# Altium PCB PCB2.PcbDoc
Units mm, origin at the board's own origin, x right, y up, seen from the top; angles counter-clockwise.
Board outline 31.39 x 23.51 mm, 2 copper layers (Top Layer, Bottom Layer); 24 components, 18 nets, 48 pads, 0 vias.
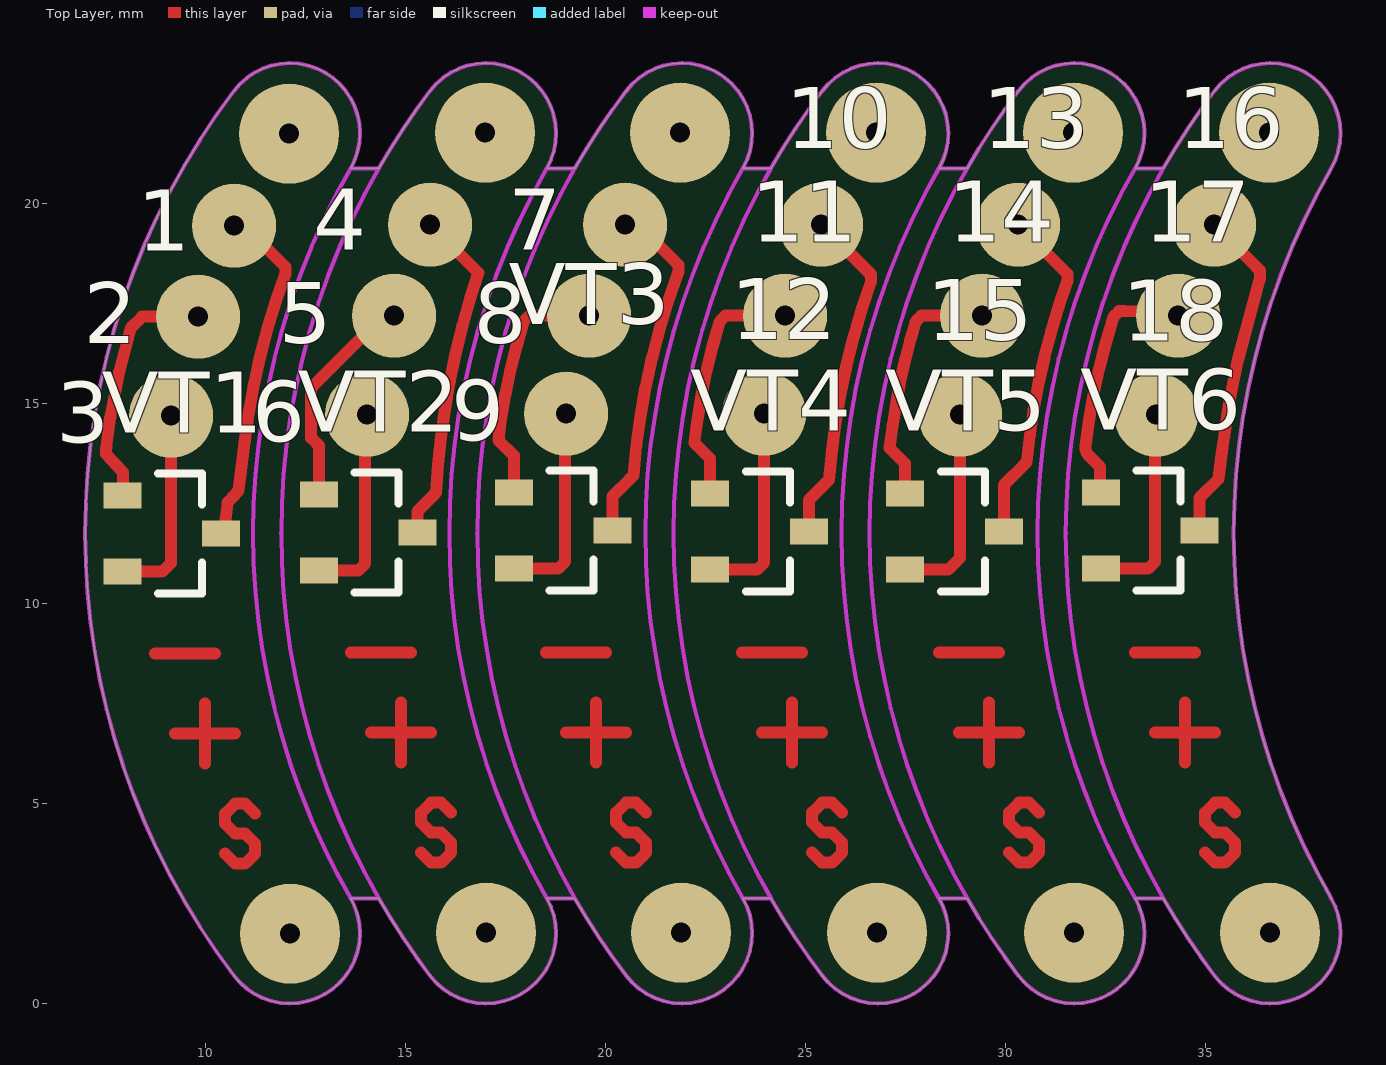
[diagram p0: Top Layer view]
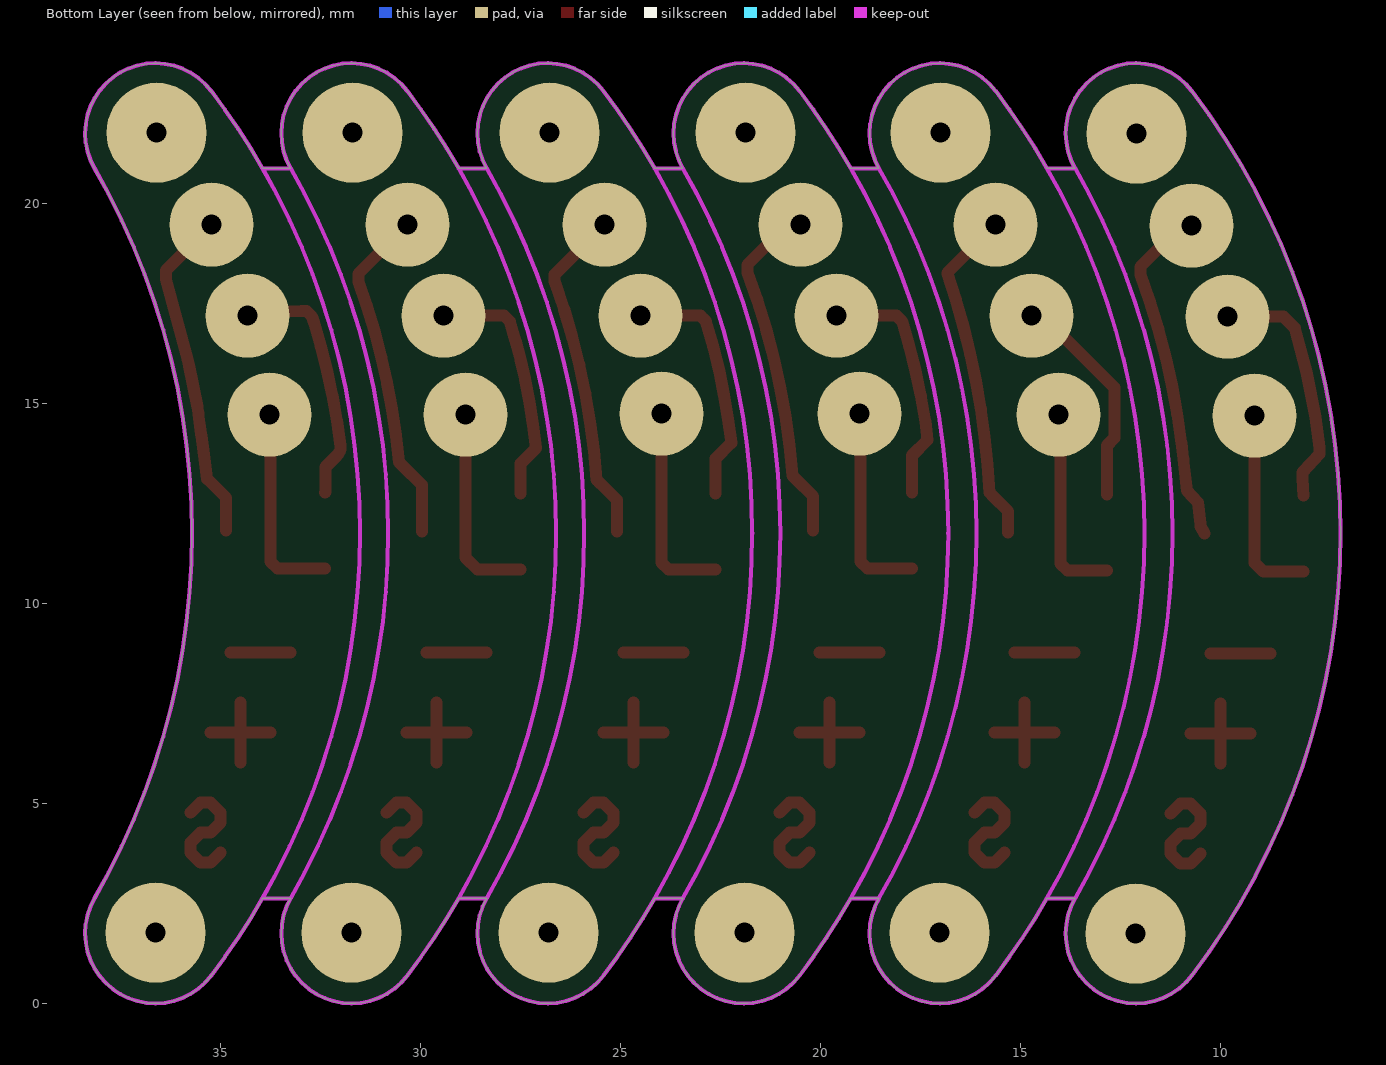
[diagram p1: Bottom Layer view, seen from below]
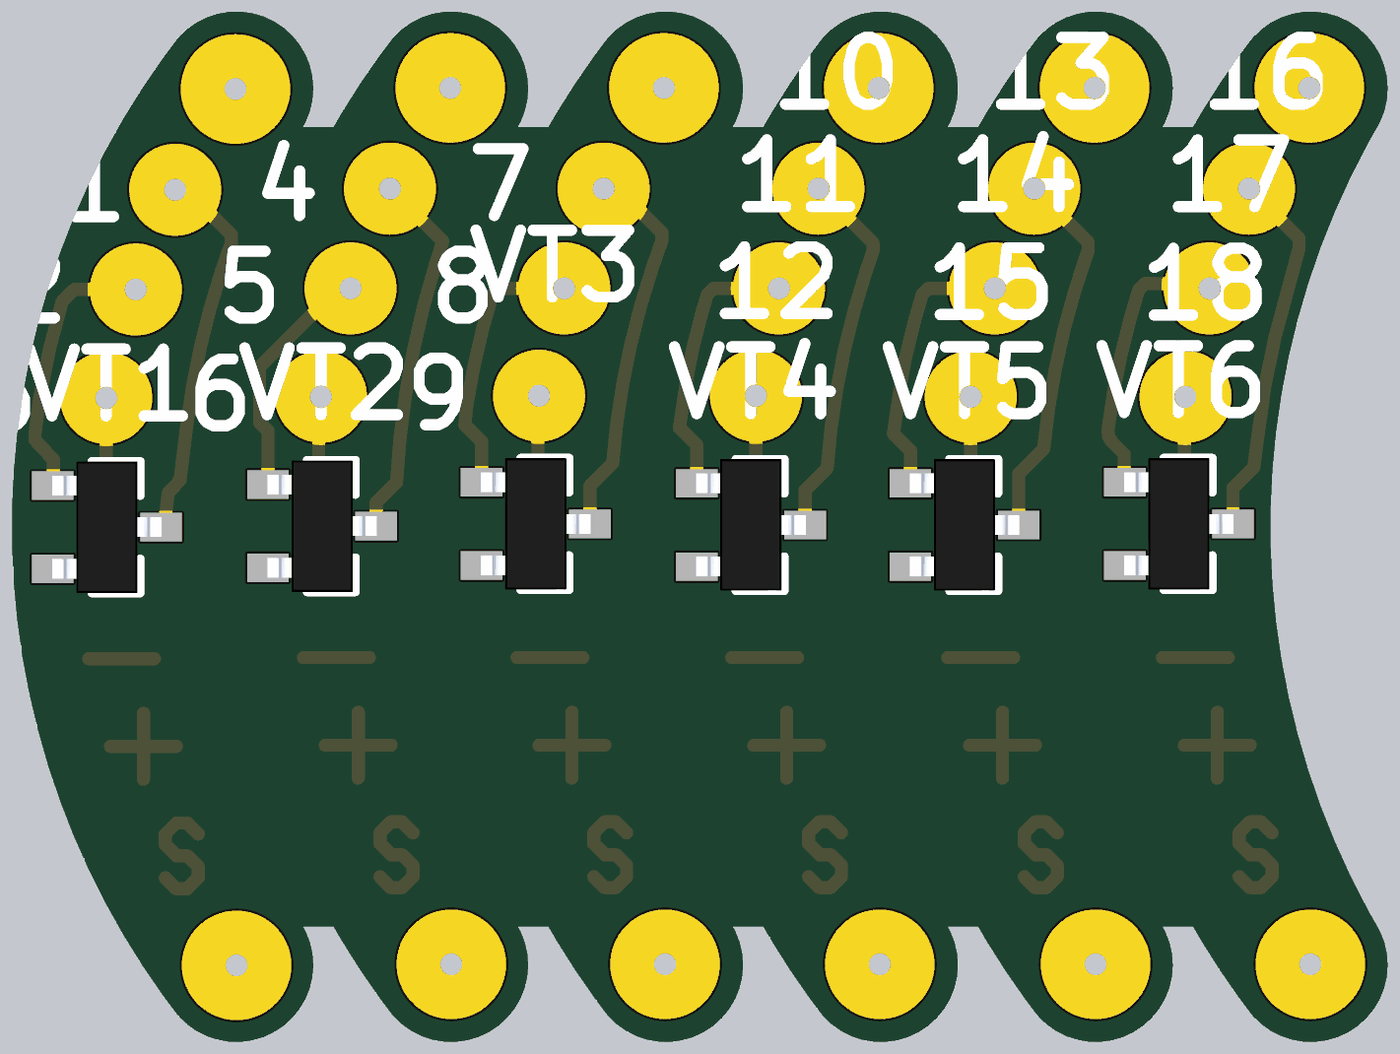
[diagram p2: 3D render of the assembled board from above, using the file's embedded part models]

## Layer stack, top to bottom
Top Solder: solder mask 0.0102, Solder Resist, Dk 3.5
Top Layer: signal copper 0.0356
Dielectric 1: dielectric 0.32, FR-4, Dk 4.8
Bottom Layer: signal copper 0.0356
Bottom Solder: solder mask 0.0102, Solder Resist, Dk 3.5

## Board outline
14.34,2.635 ccw(c30.203,11.76) 15.623,0.7 ccw(c17.02,1.76) 18.54,2.635 19.243,2.635 ccw(c35.105,11.76) 20.526,0.7 ccw(c21.923,1.76) 23.443,2.635 24.146,2.635 ccw(c40.008,11.76) 25.429,0.7 ccw(c26.826,1.76) 28.346,2.635 29.049,2.635 ccw(c44.911,11.76) 30.331,0.7 ccw(c31.729,1.76) 33.249,2.635 33.951,2.635 ccw(c49.814,11.76) 35.234,0.7 ccw(c36.631,1.76) 38.151,2.635 cw(c54.014,11.76) 38.151,20.886 ccw(c36.631,21.76) 35.234,22.82 ccw(c49.814,11.76) 33.951,20.886 33.249,20.886 ccw(c31.729,21.76) 30.331,22.82 ccw(c44.911,11.76) 29.049,20.886 28.346,20.886 ccw(c26.826,21.76) 25.429,22.82 ccw(c40.008,11.76) 24.146,20.886 23.443,20.886 ccw(c21.923,21.76) 20.526,22.82 ccw(c35.105,11.76) 19.243,20.886 18.54,20.886 ccw(c17.02,21.76) 15.623,22.82 ccw(c30.203,11.76) 14.34,20.886 13.638,20.886 ccw(c12.117,21.76) 10.72,22.82 ccw(c25.3,11.76) 10.72,0.7 ccw(c12.117,1.76) 13.638,2.635

## Design rules (kind name [scope] priority, off if disabled: settings)
AcuteAngle min_acute_angle [OnCopper] p1: minimum=3.50000000000000E+0001 checktracksonly=FALSE // Минимальный угол между примитивами топологии
BoardOutlineClearance board_outline_clearance_std [NOT (OnLayer('Bottom Overlay') OR OnLayer('Top Overlay'))] p1: gap=0.25 ignorepadtopadclearanceinfootprint=FALSE except(0: Arc-SplitContinuation Track-SplitContinuation SMDPad-SplitContinuation THPad-SplitContinuation Via-SplitContinuation Fill-SplitContinuation Poly-SplitContinuation Region-SplitContinuation Text-SplitContinuation) // Отступ элементов топологии от края фрезеруемой печатной платы
Clearance clearance_outer_35um_std [OnTopLayer OR OnBottomLayer] p1: gap=0.2 ignorepadtopadclearanceinfootprint=TRUE except(0.25: Arc-Hole Track-Hole SMDPad-Hole THPad-Hole Via-Hole Fill-Hole Poly-Hole Region-Hole Text-Hole) // Зазоры на внешних слоях
Clearance clearance_inner_35um_std [NOT (OnTopLayer Or OnBottomLayer)] p2: gap=0.2 ignorepadtopadclearanceinfootprint=FALSE except(0.25: Arc-Hole Track-Hole SMDPad-Hole THPad-Hole Via-Hole Fill-Hole Poly-Hole Region-Hole Text-Hole) // Зазоры на внутренних слоях
ComponentClearance [All] p1: gap=0 collisioncheckmode=3 verticalgap=0 showdistances=FALSE
DiffPairsRouting diff_pairs_routing [All] p1: maxlimit=0.127 minlimit=0.127 mostfreqgap=0.127 toplayer_minwidth=0.143 toplayer_maxwidth=0.143 toplayer_prefwidth=0.143 bottomlayer_minwidth=0.143 bottomlayer_maxwidth=0.143 bottomlayer_prefwidth=0.143 impedanceprofiledriven=TRUE impedanceprofileid={FD46899E-B5A2-4EF5-A302-5D2DB6A51F35} maxuncoupledlength=12.7 // Правила трассировки дифференциальных пар
HoleSize min_hole_size_std [IsPad] p1: absolutevalues=TRUE maxlimit=5.9 minlimit=0.6 maxpercent=80.000 minpercent=20.000 // Диаметр межслойного переходного отверстия
HoleSize min_hole_size_via_std [IsVia] p2: absolutevalues=TRUE maxlimit=5.9 minlimit=0.3 maxpercent=80.000 minpercent=20.000 // Минимальный диаметр монтажного отверстия
HoleToHoleClearance hole_to_hole_clearance_std [All] p1: gap=0.2 allowstackedmicrovias=FALSE // Минимальное расстояние между краями двух отверстий
MinimumAnnularRing min_via_ar_std [All] p1: minimumring=0.15 // Поясок площадки переходного отверстия (Annular ring VIA)
MinimumAnnularRing min_pad_ar_std [All] p2: minimumring=0.2 // Поясок монтажной контактной площадки (Annular ring PAD)
MinimumSolderMaskSliver min_solder_mask_bridge_std [All] p1: minsoldermaskwidth=0.15 // Мнимальная ширина масочного мостика
PlaneClearance plane_clearance_35um_std [All] p1: clearance=0.2 // Отступ полигона (для слоя plane) от элементов топологии
PlaneConnect [All] p1: planeconnectstyle=Relief reliefexpansion=0.5 reliefentries=4 reliefconductorwidth=0.2 reliefairgap=0.2
PolygonConnect poly_connect_to_pad<=0.3 [(AsMM(PadXSize_AllLayers)<=0.301) or (AsMM(PadYSize_AllLayers)<=0.301)] p1: thpad.connectstyle=Relief thpad.reliefconductorwidth=0.2 thpad.reliefentries=4 thpad.polygonreliefangle="90 Angle" thpad.airgapwidth=0.2 smdpad.connectstyle=Relief smdpad.reliefconductorwidth=0.2 smdpad.reliefentries=4 smdpad.polygonreliefangle="90 Angle" smdpad.airgapwidth=0.2 via.connectstyle=Direct via.reliefconductorwidth=0.254 via.reliefentries=4 via.polygonreliefangle="90 Angle" via.airgapwidth=0.254 // Правила подключения полигонов для падов от 0,3мм и меньше
PolygonConnect poly_connect_to_pad<=0.4 [(AsMM(PadXSize_AllLayers)<=0.401) or (AsMM(PadYSize_AllLayers)<=0.401)] p2: thpad.connectstyle=Relief thpad.reliefconductorwidth=0.26 thpad.reliefentries=4 thpad.polygonreliefangle="90 Angle" thpad.airgapwidth=0.2 smdpad.connectstyle=Relief smdpad.reliefconductorwidth=0.26 smdpad.reliefentries=4 smdpad.polygonreliefangle="90 Angle" smdpad.airgapwidth=0.2 via.connectstyle=Direct via.reliefconductorwidth=0.254 via.reliefentries=4 via.polygonreliefangle="90 Angle" via.airgapwidth=0.254 // Правила подключения полигонов для падов от 0,4 и меньше
PolygonConnect poly_connect_to_pad<=0.6 [(AsMM(PadXSize_AllLayers)<=0.601) or (AsMM(PadYSize_AllLayers)<=0.601)] p3: thpad.connectstyle=Relief thpad.reliefconductorwidth=0.33 thpad.reliefentries=4 thpad.polygonreliefangle="90 Angle" thpad.airgapwidth=0.2 smdpad.connectstyle=Relief smdpad.reliefconductorwidth=0.33 smdpad.reliefentries=4 smdpad.polygonreliefangle="90 Angle" smdpad.airgapwidth=0.2 via.connectstyle=Direct via.reliefconductorwidth=0.254 via.reliefentries=4 via.polygonreliefangle="90 Angle" via.airgapwidth=0.254 // Правила подключения полигонов для падов от 0,6мм и меньше
PolygonConnect poly_connect_to_pad<=0.7 [(AsMM(PadXSize_AllLayers)<=0.701) or (AsMM(PadYSize_AllLayers)<=0.701)] p4: thpad.connectstyle=Relief thpad.reliefconductorwidth=0.46 thpad.reliefentries=4 thpad.polygonreliefangle="90 Angle" thpad.airgapwidth=0.2 smdpad.connectstyle=Relief smdpad.reliefconductorwidth=0.46 smdpad.reliefentries=4 smdpad.polygonreliefangle="90 Angle" smdpad.airgapwidth=0.2 via.connectstyle=Direct via.reliefconductorwidth=0.254 via.reliefentries=4 via.polygonreliefangle="90 Angle" via.airgapwidth=0.254 // Правила подключения полигонов для падов от 0,7мм и меньше
PolygonConnect poly_connect_to_pad<=0.8 [(AsMM(PadXSize_AllLayers)<=0.8)or(AsMM(PadYSize_AllLayers)<=0.8)] p5: thpad.connectstyle=Relief thpad.reliefconductorwidth=0.53 thpad.reliefentries=4 thpad.polygonreliefangle="90 Angle" thpad.airgapwidth=0.3 smdpad.connectstyle=Relief smdpad.reliefconductorwidth=0.53 smdpad.reliefentries=4 smdpad.polygonreliefangle="90 Angle" smdpad.airgapwidth=0.2 via.connectstyle=Direct via.reliefconductorwidth=0.254 via.reliefentries=4 via.polygonreliefangle="90 Angle" via.airgapwidth=0.254 // Правила подключения полигонов для падов от 0,8мм и меньше
PolygonConnect poly_connect_to_pad<=1 [(AsMM(PadXSize_AllLayers)<=1.01)or(AsMM(PadYSize_AllLayers)<=1.01)] p6: thpad.connectstyle=Relief thpad.reliefconductorwidth=0.6 thpad.reliefentries=4 thpad.polygonreliefangle="90 Angle" thpad.airgapwidth=0.3 smdpad.connectstyle=Relief smdpad.reliefconductorwidth=0.6 smdpad.reliefentries=4 smdpad.polygonreliefangle="90 Angle" smdpad.airgapwidth=0.2 via.connectstyle=Direct via.reliefconductorwidth=0.254 via.reliefentries=4 via.polygonreliefangle="90 Angle" via.airgapwidth=0.254 // Правила подключения полигонов для падов от 1мм и меньше
PolygonConnect poly_connect_to_pad<=1.3 [(AsMM(PadXSize_AllLayers)<=1.31)or(AsMM(PadYSize_AllLayers)<=1.31)] p7: thpad.connectstyle=Relief thpad.reliefconductorwidth=0.66 thpad.reliefentries=4 thpad.polygonreliefangle="90 Angle" thpad.airgapwidth=0.3 smdpad.connectstyle=Relief smdpad.reliefconductorwidth=0.86 smdpad.reliefentries=4 smdpad.polygonreliefangle="90 Angle" smdpad.airgapwidth=0.2 via.connectstyle=Direct via.reliefconductorwidth=0.254 via.reliefentries=4 via.polygonreliefangle="90 Angle" via.airgapwidth=0.254 // Правила подключения полигонов для падов от 1,3мм и меньше
PolygonConnect poly_connect_to_pad<=1.6 [(AsMM(PadXSize_AllLayers)<=1.61)or(AsMM(PadYSize_AllLayers)<=1.61)] p8: thpad.connectstyle=Relief thpad.reliefconductorwidth=0.8 thpad.reliefentries=4 thpad.polygonreliefangle="90 Angle" thpad.airgapwidth=0.3 smdpad.connectstyle=Relief smdpad.reliefconductorwidth=1 smdpad.reliefentries=4 smdpad.polygonreliefangle="90 Angle" smdpad.airgapwidth=0.2 via.connectstyle=Direct via.reliefconductorwidth=0.254 via.reliefentries=4 via.polygonreliefangle="90 Angle" via.airgapwidth=0.254 // Правила подключения полигонов для падов от 1,6мм и меньше
PolygonConnect poly_connect_to_pad<=1.8 [(AsMM(PadXSize_AllLayers)<=1.8)or(AsMM(PadYSize_AllLayers)<=1.8)] p9: thpad.connectstyle=Relief thpad.reliefconductorwidth=1 thpad.reliefentries=4 thpad.polygonreliefangle="90 Angle" thpad.airgapwidth=0.3 smdpad.connectstyle=Relief smdpad.reliefconductorwidth=1.2 smdpad.reliefentries=4 smdpad.polygonreliefangle="90 Angle" smdpad.airgapwidth=0.2 via.connectstyle=Direct via.reliefconductorwidth=0.254 via.reliefentries=4 via.polygonreliefangle="90 Angle" via.airgapwidth=0.254 // Правила подключения полигонов для падов от 1,8мм и меньше
PolygonConnect poly_connect_to_pad<=2 [(AsMM(PadXSize_AllLayers)<=2.01)or(AsMM(PadYSize_AllLayers)<=2.01)] p10: thpad.connectstyle=Relief thpad.reliefconductorwidth=1.1 thpad.reliefentries=4 thpad.polygonreliefangle="90 Angle" thpad.airgapwidth=0.3 smdpad.connectstyle=Relief smdpad.reliefconductorwidth=1.4 smdpad.reliefentries=4 smdpad.polygonreliefangle="90 Angle" smdpad.airgapwidth=0.2 via.connectstyle=Direct via.reliefconductorwidth=0.254 via.reliefentries=4 via.polygonreliefangle="90 Angle" via.airgapwidth=0.254 // Правила подключения полигонов для падов от 2мм и меньше
PolygonConnect poly_connect_to_pad<=2.3 [(AsMM(PadXSize_AllLayers)<=2.31)or(AsMM(PadYSize_AllLayers)<=2.31)] p11: thpad.connectstyle=Relief thpad.reliefconductorwidth=1.2 thpad.reliefentries=4 thpad.polygonreliefangle="90 Angle" thpad.airgapwidth=0.3 smdpad.connectstyle=Relief smdpad.reliefconductorwidth=1.4 smdpad.reliefentries=4 smdpad.polygonreliefangle="90 Angle" smdpad.airgapwidth=0.2 via.connectstyle=Direct via.reliefconductorwidth=0.254 via.reliefentries=4 via.polygonreliefangle="90 Angle" via.airgapwidth=0.254 // Правила подключения полигонов для падов от 2,3мм и меньше
PolygonConnect poly_connect_to_pad<=2.5 [(AsMM(PadXSize_AllLayers)<=2.51)or(AsMM(PadYSize_AllLayers)<=2.51)] p12: thpad.connectstyle=Relief thpad.reliefconductorwidth=1.2 thpad.reliefentries=4 thpad.polygonreliefangle="90 Angle" thpad.airgapwidth=0.3 smdpad.connectstyle=Relief smdpad.reliefconductorwidth=1.4 smdpad.reliefentries=4 smdpad.polygonreliefangle="90 Angle" smdpad.airgapwidth=0.2 via.connectstyle=Direct via.reliefconductorwidth=0.254 via.reliefentries=4 via.polygonreliefangle="90 Angle" via.airgapwidth=0.254 // Правила подключения полигонов для падов от 2,5мм и меньше
PolygonConnect poly_connect_to_pad<=2.7 [(AsMM(PadXSize_AllLayers)<=2.71)or(AsMM(PadYSize_AllLayers)<=2.71)] p13: thpad.connectstyle=Relief thpad.reliefconductorwidth=1.4 thpad.reliefentries=4 thpad.polygonreliefangle="90 Angle" thpad.airgapwidth=0.3 smdpad.connectstyle=Relief smdpad.reliefconductorwidth=1.6 smdpad.reliefentries=4 smdpad.polygonreliefangle="90 Angle" smdpad.airgapwidth=0.2 via.connectstyle=Direct via.reliefconductorwidth=0.254 via.reliefentries=4 via.polygonreliefangle="90 Angle" via.airgapwidth=0.254 // Правила подключения полигонов для падов от 2,7мм и меньше
PolygonConnect poly_connect_to_pad<=3 [(AsMM(PadXSize_AllLayers)<=3.01)or(AsMM(PadYSize_AllLayers)<=3.01)] p14: thpad.connectstyle=Relief thpad.reliefconductorwidth=1.6 thpad.reliefentries=4 thpad.polygonreliefangle="90 Angle" thpad.airgapwidth=0.3 smdpad.connectstyle=Relief smdpad.reliefconductorwidth=1.8 smdpad.reliefentries=4 smdpad.polygonreliefangle="90 Angle" smdpad.airgapwidth=0.2 via.connectstyle=Direct via.reliefconductorwidth=0.254 via.reliefentries=4 via.polygonreliefangle="90 Angle" via.airgapwidth=0.254 // Правила подключения полигонов для падов от 3мм и меньше
PolygonConnect poly_connect_to_pad<=7 [(AsMM(PadXSize_AllLayers)<7.01)or(AsMM(PadYSize_AllLayers)<=7.01)] p15: thpad.connectstyle=Relief thpad.reliefconductorwidth=2 thpad.reliefentries=4 thpad.polygonreliefangle="90 Angle" thpad.airgapwidth=0.4 smdpad.connectstyle=Relief smdpad.reliefconductorwidth=2 smdpad.reliefentries=4 smdpad.polygonreliefangle="90 Angle" smdpad.airgapwidth=0.3 via.connectstyle=Direct via.reliefconductorwidth=0.254 via.reliefentries=4 via.polygonreliefangle="90 Angle" via.airgapwidth=0.254 // Правила подключения полигонов для падов от 7мм и меньше
PolygonConnect poly_connect_to_pad [All] p16: thpad.connectstyle=Relief thpad.reliefconductorwidth=0.25 thpad.reliefentries=4 thpad.polygonreliefangle="90 Angle" thpad.airgapwidth=0.2 smdpad.connectstyle=Relief smdpad.reliefconductorwidth=0.25 smdpad.reliefentries=4 smdpad.polygonreliefangle="90 Angle" smdpad.airgapwidth=0.2 via.connectstyle=Direct via.reliefconductorwidth=0.25 via.reliefentries=4 via.polygonreliefangle="90 Angle" via.airgapwidth=0.2 // Правила подключения полигонов общие
RoutingCorners [All] p1 off: cornerstyle=45-Degree minsetback=2.5 maxsetback=2.5
RoutingVias [All] p1: holewidth=0.3 width=0.6 viastyle="Through Hole" minholewidth=0.3 minwidth=0.6 maxholewidth=5.9 maxwidth=6.4
SilkToSilkClearance silk_to_silk_clearance_std [All] p1 off: silktosilkclearance=0.15 // Отступ текста шелкографии от других примитивов шелкографии
SilkToSolderMaskClearance silk_to_solder_mask_clearance_std [IsPad] p1 off: minsilkscreentomaskgap=0.15 clearancetoexposedcopper=FALSE // Минимальное расстояние между элементами шелкографии и вскрытой медью
SolderMaskExpansion solder_mask_expansion_std [All] p1: expansion=0.05 istentingtop=FALSE // Припуск паяльной масски
UnRoutedNet [All] p1: checkbadconnections=TRUE
Width width_35um_std [All] p1: maxlimit=10 minlimit=0.2 preferedwidth=0.2 checkconnectedcopper=TRUE // Ширина проводников (общая)
19 further rules are at their usual default settings.

## Components (designator, comment, footprint, x,y, rotation, side; value= is the part's Value field where it differs from the comment)
1 "" WIRE_SOLDER_POINT2.1_0.5 10.725,19.45 r90 top
2 "" WIRE_SOLDER_POINT2.1_0.5 9.825,17.175 r90 top
3 "" WIRE_SOLDER_POINT2.1_0.5 9.15,14.7 r90 top
4 "" WIRE_SOLDER_POINT2.1_0.5 15.625,19.475 r90 top
5 "" WIRE_SOLDER_POINT2.1_0.5 14.725,17.2 r90 top
6 "" WIRE_SOLDER_POINT2.1_0.5 14.05,14.725 r90 top
7 "" WIRE_SOLDER_POINT2.1_0.5 20.5,19.475 r90 top
8 "" WIRE_SOLDER_POINT2.1_0.5 19.6,17.2 r90 top
9 "" WIRE_SOLDER_POINT2.1_0.5 19.025,14.75 r90 top
10 "" WIRE_SOLDER_POINT2.1_0.5 25.4,19.475 r0 top
11 "" WIRE_SOLDER_POINT2.1_0.5 24.5,17.2 r0 top
12 "" WIRE_SOLDER_POINT2.1_0.5 23.975,14.75 r0 top
13 "" WIRE_SOLDER_POINT2.1_0.5 30.325,19.475 r0 top
14 "" WIRE_SOLDER_POINT2.1_0.5 29.425,17.2 r0 top
15 "" WIRE_SOLDER_POINT2.1_0.5 28.875,14.725 r0 top
16 "" WIRE_SOLDER_POINT2.1_0.5 35.225,19.475 r0 top
17 "" WIRE_SOLDER_POINT2.1_0.5 34.325,17.2 r0 top
18 "" WIRE_SOLDER_POINT2.1_0.5 33.775,14.725 r0 top
VT1 "FDN340P" SOT23 9.165,11.75 r0 top
VT2 "FDN340P" SOT23 14.075,11.775 r0 top
VT3 "FDN340P" SOT23 18.95,11.825 r0 top
VT4 "FDN340P" SOT23 23.86,11.8 r0 top
VT5 "FDN340P" SOT23 28.735,11.8 r0 top
VT6 "FDN340P" SOT23 33.625,11.825 r0 top

## Footprints (in the part's own frame and the unit in brackets; to place one, negate y for a bottom-side part, rotate by r counter-clockwise, add the part's x,y. Pads: shape width x height; smd on the part's side, far side on the other; paste and mask are expansions set on the pad)
SOT23 [mm] "mosfet"
  rect 0.95x0.65 smd: 1(-1.235,0.95) 2(-1.235,-0.95) 3(1.235,0)
  silkscreen extent -0.34,-1.5 0.76,1.5, body extent -1.25,-1.5 1.25,1.5, height 1.05
WIRE_SOLDER_POINT2.1_0.5 [mm] "Отверстие для пайки провода"
  round 2.1 hole 0.5: 1(0,0)

## Part data
1 2 3 4 5 6 7 8 9 10 11 12 13 14 15 16 17 18: library part SolderPoint, "Контакт"
VT1 VT2 VT3 VT4 VT5 VT6: Name=FDN340P

## Free pads (board coordinates)
  round 2.5 hole 0.5: ""(12.1,21.75) ""(12.125,1.75) ""(17,21.775) ""(17.025,1.775) ""(21.875,21.775) ""(21.9,1.775) ""(26.775,21.775) ""(26.8,1.775) ""(31.7,21.775) ""(31.725,1.775) ""(36.6,21.775) ""(36.625,1.775)

## Nets (pads, with @x,y where several pads share a name; then routed paths per layer and width w, separated by ;. In a path a pad name is that pad's centre, name@x,y a point inside that pad or via, vN(x,y) a via of type N, cw(c..) or ccw(c..) an arc to the next point about the centre after c; other vN are vias at no path point)
Net1_1: 1.1 VT1.3 | length 8.7
  Top Layer w0.3: VT1.3 10.499,11.925 10.499,11.994 10.565,12.531 10.698,12.676 10.835,12.824 10.932,13.623 10.981,14.023 cw(c29.5,11.76) 12.006,18.241 12.006,18.295 12.006,18.419 10.975,19.45 1.1
Net2_1: 2.1 VT1.1 | length 6.2
  Top Layer w0.3: VT1.1 7.937,12.875 7.949,13.16 7.949,13.283 7.525,13.745 7.525,13.881 7.528,13.901 7.626,14.653 7.628,14.663 7.851,15.793 8.143,16.893 8.425,17.175 2.1
Net3_1: 3.1 VT1.2 | length 5
  Top Layer w0.3: VT1.2 8.927,10.8 9.15,11.023 3.1
Net4_1: 4.1 VT2.3 | length 8.5
  Top Layer w0.3: VT2.3 15.31,12.31 15.693,12.693 15.774,12.774 cw(c36.491,11.646) 16.829,18.271 4.1
Net5_1: 5.1 VT2.1 | length 5.6
  Top Layer w0.3: VT2.1 12.84,13.955 12.65,14.145 12.65,15.4 14.45,17.2 5.1
Net6_1: 6.1 VT2.2 | length 5
  Top Layer w0.3: VT2.2 13.824,10.825 14,11.001 14,14.675 6.1
Net7_1: 7.1 VT3.3 | length 8.7
  Top Layer w0.3: VT3.3 20.185,12.685 20.627,13.127 20.705,13.205 cw(c39.306,11.76) 21.83,18.291 21.83,18.345 21.83,18.47 20.825,19.475 7.1
Net8_1: 8.1 VT3.1 | length 6.2
  Top Layer w0.3: VT3.1 17.715,13.705 17.331,14.089 cw(c48.697,10.969) 17.381,14.554 17.382,14.561 cw(c35.106,11.76) 17.962,17.059 18.015,17.112 18.103,17.2 8.1
Net9_1: 9.1 VT3.2 | length 5.1
  Top Layer w0.3: VT3.2 18.824,10.875 19,11.051 19,14.725 9.1
Net10_1: 10.1 VT4.3 | length 8.5
  Top Layer w0.3: VT4.3 25.095,12.595 25.521,13.021 25.6,13.1 cw(c44.208,11.76) 26.645,18.053 26.645,18.105 26.645,18.23 10.1
Net11_1: 11.1 VT4.1 | length 6.2
  Top Layer w0.3: VT4.1 22.625,13.625 22.228,14.022 cw(c45.236,11.095) 22.524,15.795 cw(c45.236,11.095) 22.525,15.799 cw(c40.008,11.76) 22.865,17.059 22.918,17.112 23.006,17.2 11.1
Net12_1: 12.1 VT4.2 | length 5.1
  Top Layer w0.3: VT4.2 23.799,10.85 23.975,11.026 12.1
Net13_1: 13.1 VT5.3 | length 8.5
  Top Layer w0.3: VT5.3 29.97,12.97 30.464,13.464 30.54,13.54 cw(c49.111,11.76) 31.554,18.07 31.554,18.122 31.554,18.246 13.1
Net14_1: 14.1 VT5.1 | length 6.3
  Top Layer w0.3: VT5.1 27.5,13.5 27.113,13.887 cw(c49.941,11.159) 27.385,15.609 27.386,15.612 cw(c44.911,11.76) 27.768,17.059 27.821,17.112 27.908,17.2 14.1
Net15_1: 15.1 VT5.2 | length 5.1
  Top Layer w0.3: VT5.2 28.574,10.85 28.875,11.151 15.1
Net16_1: 16.1 VT6.3 | length 8.4
  Top Layer w0.3: VT6.3 34.86,12.644 35.335,13.12 35.412,13.725 35.478,14.19 35.489,14.239 35.557,14.758 35.557,14.772 35.578,14.919 35.789,15.956 35.82,16.1 36.367,18.12 36.367,18.333 36.29,18.41 16.1
Net17_1: 17.1 VT6.1 | length 6.3
  Top Layer w0.3: 32.089,13.704 cw(c32.302,13.916) 32.004,13.949 cw(c49.577,11.789) 32.675,17.06 cw(c49.577,11.789) 32.71,17.172 32.85,17.311 32.977,17.311 34.237,17.288 34.324,17.202 cw(c34.112,16.989) 17.1 ; 32.09,13.703 32.375,13.419 32.375,12.79 VT6.1
Net18_1: 18.1 VT6.2 | length 5.1
  Top Layer w0.3: VT6.2 33.574,10.875 33.75,11.051 33.75,14.7 18.1
copper on no net: | length 47.2
  Top Layer w0.3: 8.75,8.75 10.25,8.75 ; 9.25,6.75 10.75,6.75 ; 10,6 10,7.5 ; 10.5,3.75 10.75,3.5 11,3.5 11.25,3.75 11.25,4 11,4.25 10.75,4.25 10.5,4.5 10.5,4.75 10.75,5 11,5 11.25,4.75 ; 13.65,8.775 15.15,8.775 ; 14.15,6.775 15.65,6.775 ; 14.9,6.025 14.9,7.525 ; 15.4,3.775 15.65,3.525 15.9,3.525 16.15,3.775 16.15,4.025 15.9,4.275 15.65,4.275 15.4,4.525 15.4,4.775 15.65,5.025 15.9,5.025 16.15,4.775 ; 18.525,8.775 20.025,8.775 ; 19.025,6.775 20.525,6.775 ; 19.775,6.025 19.775,7.525 ; 20.275,3.775 20.525,3.525 20.775,3.525 21.025,3.775 21.025,4.025 20.775,4.275 20.525,4.275 20.275,4.525 20.275,4.775 20.525,5.025 20.775,5.025 21.025,4.775 ; 23.425,8.775 24.925,8.775 ; 23.925,6.775 25.425,6.775 ; 24.675,6.025 24.675,7.525 ; 25.175,3.775 25.425,3.525 25.675,3.525 25.925,3.775 25.925,4.025 25.675,4.275 25.425,4.275 25.175,4.525 25.175,4.775 25.425,5.025 25.675,5.025 25.925,4.775 ; 28.35,8.775 29.85,8.775 ; 28.85,6.775 30.35,6.775 ; 29.6,6.025 29.6,7.525 ; 30.1,3.775 30.35,3.525 30.6,3.525 30.85,3.775 30.85,4.025 30.6,4.275 30.35,4.275 30.1,4.525 30.1,4.775 30.35,5.025 30.6,5.025 30.85,4.775 ; 33.25,8.775 34.75,8.775 ; 33.75,6.775 35.25,6.775 ; 34.5,6.025 34.5,7.525 ; 35,3.775 35.25,3.525 35.5,3.525 35.75,3.775 35.75,4.025 35.5,4.275 35.25,4.275 35,4.525 35,4.775 35.25,5.025 35.5,5.025 35.75,4.775

## Keep-outs
Keep-Out Layer:
  circle w0.1: c21.708,11.76 r0.003
  circle w0.1: c26.611,11.76 r0.003
  circle w0.1: c16.806,11.76 r0.003
  circle w0.1: c31.514,11.76 r0.003
  circle w0.1: c11.903,11.76 r0.003
  lines w0.1: 13.638,2.635 cw(c12.117,1.76) 10.72,0.7 cw(c25.3,11.76) 10.72,22.82 cw(c12.117,21.76) 13.638,20.886 ; 13.638,2.635 cw(c29.5,11.76) 13.638,20.886 ; 13.638,2.635 14.34,2.635 ; 13.638,20.886 14.34,20.886 ; 14.34,2.635 cw(c30.203,11.76) 14.34,20.886 ; 14.34,2.635 ccw(c30.203,11.76) 15.623,0.7 ccw(c17.02,1.76) 18.54,2.635 ; 14.34,20.886 cw(c30.203,11.76) 15.623,22.82 cw(c17.02,21.76) 18.54,20.886 ; 18.54,2.635 cw(c34.403,11.76) 18.54,20.886 ; 18.54,2.635 19.243,2.635 ; 18.54,20.886 19.243,20.886 ; 19.243,2.635 ccw(c35.106,11.76) 20.526,0.7 ccw(c21.923,1.76) 23.443,2.635 ; 19.243,2.635 cw(c35.106,11.76) 19.243,20.886 ; 19.243,20.886 cw(c35.106,11.76) 20.526,22.82 cw(c21.923,21.76) 23.443,20.886 ; 23.443,2.635 cw(c39.306,11.76) 23.443,20.886 ; 23.443,2.635 24.146,2.635 ; 23.443,20.886 24.146,20.886 ; 24.146,2.635 ccw(c40.008,11.76) 25.429,0.7 ccw(c26.826,1.76) 28.346,2.635 ; 24.146,2.635 cw(c40.008,11.76) 24.146,20.886 ; 24.146,20.886 cw(c40.008,11.76) 25.429,22.82 cw(c26.826,21.76) 28.346,20.886 ; 28.346,2.635 cw(c44.208,11.76) 28.346,20.886 ; 28.346,2.635 29.049,2.635 ; 28.346,20.886 29.049,20.886 ; 29.049,2.635 ccw(c44.911,11.76) 30.331,0.7 ccw(c31.729,1.76) 33.249,2.635 ; 29.049,2.635 cw(c44.911,11.76) 29.049,20.886 ; 29.049,20.886 cw(c44.911,11.76) 30.331,22.82 cw(c31.729,21.76) 33.249,20.886 ; 33.249,2.635 cw(c49.111,11.76) 33.249,20.886 ; 33.249,2.635 33.951,2.635 ; 33.249,20.886 33.951,20.886 ; 33.951,2.635 ccw(c49.814,11.76) 35.234,0.7 ccw(c36.631,1.76) 38.151,2.635 cw(c54.014,11.76) 38.151,20.886 ccw(c36.631,21.76) 35.234,22.82 ccw(c49.814,11.76) 33.951,20.886 ; 33.951,2.635 cw(c49.814,11.76) 33.951,20.886

## Silkscreen, mask and mechanical layers (free items; w line width, h text height)
Mechanical 1:
  circle w0.006: c33.614,11.76 r0.003
  circle w0.013: c36.631,1.76 r1
  circle w0.013: c36.631,21.76 r1
  circle w0.006: c28.711,11.76 r0.003
  circle w0.013: c31.729,1.76 r1
  circle w0.013: c31.729,21.76 r1
  circle w0.006: c23.808,11.76 r0.003
  circle w0.013: c26.826,1.76 r1
  circle w0.013: c26.826,21.76 r1
  circle w0.006: c18.906,11.76 r0.003
  circle w0.013: c21.923,1.76 r1
  circle w0.013: c21.923,21.76 r1
  circle w0.006: c14.003,11.76 r0.003
  circle w0.013: c17.02,1.76 r1
  circle w0.013: c17.02,21.76 r1
  circle w0.006: c9.1,11.76 r0.003
  circle w0.013: c12.117,1.76 r1
  circle w0.013: c12.117,21.76 r1